# EAGLE board wchair - Copy (EAGLE 9.2.2)

Size 62 x 104 mm. Coordinates in mm from the lower left corner, seen from the top.
Outline: 0,0 62,0 62,104 0,104 0,0
Copper layers (1*16): Top 0.035mm / dielectric 1.5mm / Bottom 0.035mm
Design rules "default": minimum track width 6mil, minimum drill 0.35mm, track to track 6mil, track to pad 6mil, pad to pad 6mil, via to via 6mil, smd to smd 6mil, copper to edge 40mil, drill to drill 6mil, minimum pad ring 10mil, minimum via ring 8mil, stop-mask expansion 4mil, vias tented up to drill 0mil, thermal gap 10mil

## Footprints (pad centres in the part's own frame; a part is rotated, then mirrored left to right if it is on the bottom)
4,1 = hole 4.1: 0,0
CHIP-LED0805 = smd 1.2 x 1.2: A 0,-1.05; C 0,1.05
MINITEK2-8PINS = smd 1 x 4.1: P$1 -3,-2.75; P$2 -3,2.85; P$3 -1,-2.75; P$4 -1,2.85; P$5 1,-2.75; P$6 1,2.85; P$7 3,-2.75; P$8 3,2.85
IP40-J-LEAD = smd 3 x 2: 1 -5,-3.75; 2 5,-3.75; 3 5,3.75; 4 -5,3.75
DIP10_TDS = drill 0.813 pad 1.321: 1 -3.725,5.93; 2 -3.725,3.39; 3 -3.725,0.85; 4 -3.725,-1.69; 5 -3.725,-4.23; 6 3.707,-4.37; 7 3.895,-1.69; 8 3.895,0.85; 9 3.895,3.39; 10 3.895,5.93

## Placement (x,y rotation side)
H1  MOUNT-HOLE4.1  [4,1]  18.69,26.05 0 top
H2  MOUNT-HOLE4.1  [4,1]  44.46,26.05 0 top
H3  MOUNT-HOLE4.1  [4,1]  18.69,93.58 0 top
H4  MOUNT-HOLE4.1  [4,1]  44.46,93.58 0 top
LED1  [CHIP-LED0805]  6.44,98.31 0 top
LED2  [CHIP-LED0805]  12.1,99.38 0 top
LED3  [CHIP-LED0805]  17.68,100.4 0 top
LED4  [CHIP-LED0805]  23.1,100.62 0 top
LED5  [CHIP-LED0805]  28.59,100.78 0 top
LED6  [CHIP-LED0805]  34.09,100.78 0 top
LED7  [CHIP-LED0805]  39.52,100.62 0 top
LED8  [CHIP-LED0805]  45.09,100.4 0 top
LED9  [CHIP-LED0805]  50.55,99.38 0 top
LED10  [CHIP-LED0805]  55.97,98.31 0 top
LED11  [CHIP-LED0805]  21.87,78.5 0 top
LED12  [CHIP-LED0805]  31.26,78.5 0 top
LED13  [CHIP-LED0805]  40.95,78.5 0 top
LED14  [CHIP-LED0805]  16.09,58.81 0 top
LED15  [CHIP-LED0805]  46.41,58.81 0 top
LED16  [CHIP-LED0805]  46.91,40.38 0 top
LED17  [CHIP-LED0805]  15.59,40.38 0 top
LED18  [CHIP-LED0805]  20.23,50.79 0 top
LED19  [CHIP-LED0805]  25.75,50.79 0 top
LED20  [CHIP-LED0805]  31.17,50.79 0 top
LED21  [CHIP-LED0805]  36.73,50.79 0 top
LED22  [CHIP-LED0805]  42.2,50.79 0 top
MT1  MINITEK2-8PINS  [MINITEK2-8PINS]  -6.35,5.08 0 top  (outside the outline)
S1  1241.1619.23  [IP40-J-LEAD]  9.7,84.1 90 top
S2  1241.1619.23  [IP40-J-LEAD]  52.9,84.1 90 top
S3  1241.1619.23  [IP40-J-LEAD]  8.6,65.9 90 top
S4  1241.1619.23  [IP40-J-LEAD]  53.6,65.9 90 top
S5  1241.1619.23  [IP40-J-LEAD]  8.6,47.7 90 top
S6  1241.1619.23  [IP40-J-LEAD]  53.8,47.7 90 top
S7  1241.1619.23  [IP40-J-LEAD]  7.5,29.5 90 top
S8  1241.1619.23  [IP40-J-LEAD]  30.62,31.1 90 top
S9  1241.1619.23  [IP40-J-LEAD]  54.5,29.5 90 top
U1  TDSG3160  [DIP10_TDS]  20.68,69.1 0 top
U2  TDSG3160  [DIP10_TDS]  30.62,69.1 0 top
U3  TDSG3160  [DIP10_TDS]  40.58,69.1 0 top

## Library data of the parts
H1-H4 = holes
LED1-LED22 = led
MT1 = my_lib
S1-S3 S5 = my_pushbot; DESCRIPTION: 1-pole on-off switch Latching Push Button Switch, IP67, PCB, 30 V ac, 42 V dc; HEIGHT: mm; MANUFACTURER_NAME: SCHURTER; MANUFACTURER_PART_NUMBER: 1241.1619.23; MOUSER_PART_NUMBER: 693-1241.1619.23; MOUSER_PRICE-STOCK: https://www.mouser.com/Search/Refine.aspx?Keyword=693-1241.1619.23
S4 S6-S9 = SamacSys_Parts; DESCRIPTION: 1-pole on-off switch Latching Push Button Switch, IP67, PCB, 30 V ac, 42 V dc; HEIGHT: mm; MANUFACTURER_NAME: SCHURTER; MANUFACTURER_PART_NUMBER: 1241.1619.23; MOUSER_PART_NUMBER: 693-1241.1619.23; MOUSER_PRICE-STOCK: https://www.mouser.com/Search/Refine.aspx?Keyword=693-1241.1619.23
U1-U3 = 7segment; MANUFACTURER_PART_NUMBER: TDSG3160; VENDOR: Vishay